# Altium PCB Controller.PcbDoc
Units mil, origin at the board's own origin, x right, y up, seen from the top; angles counter-clockwise.
Board outline 3100 x 1970 mil, 2 copper layers (Top Layer, Bottom Layer); 37 components, 28 nets, 140 pads, 38 vias.
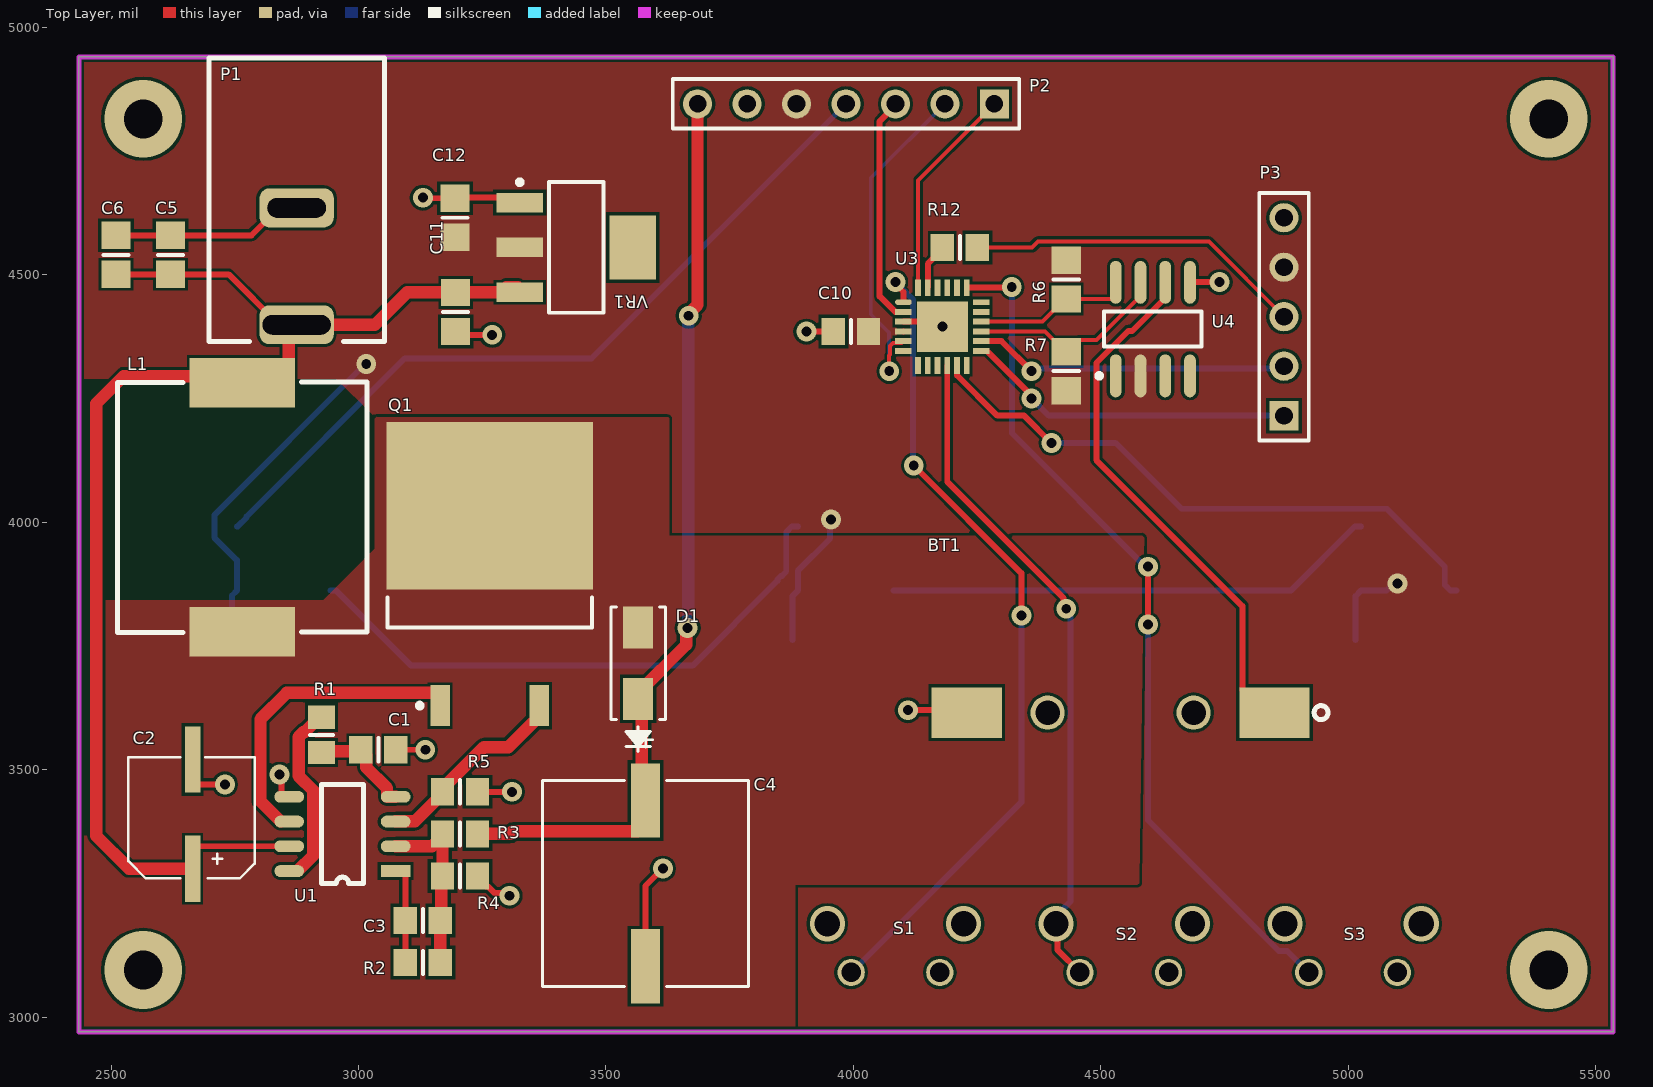
[diagram p0: Top Layer view]
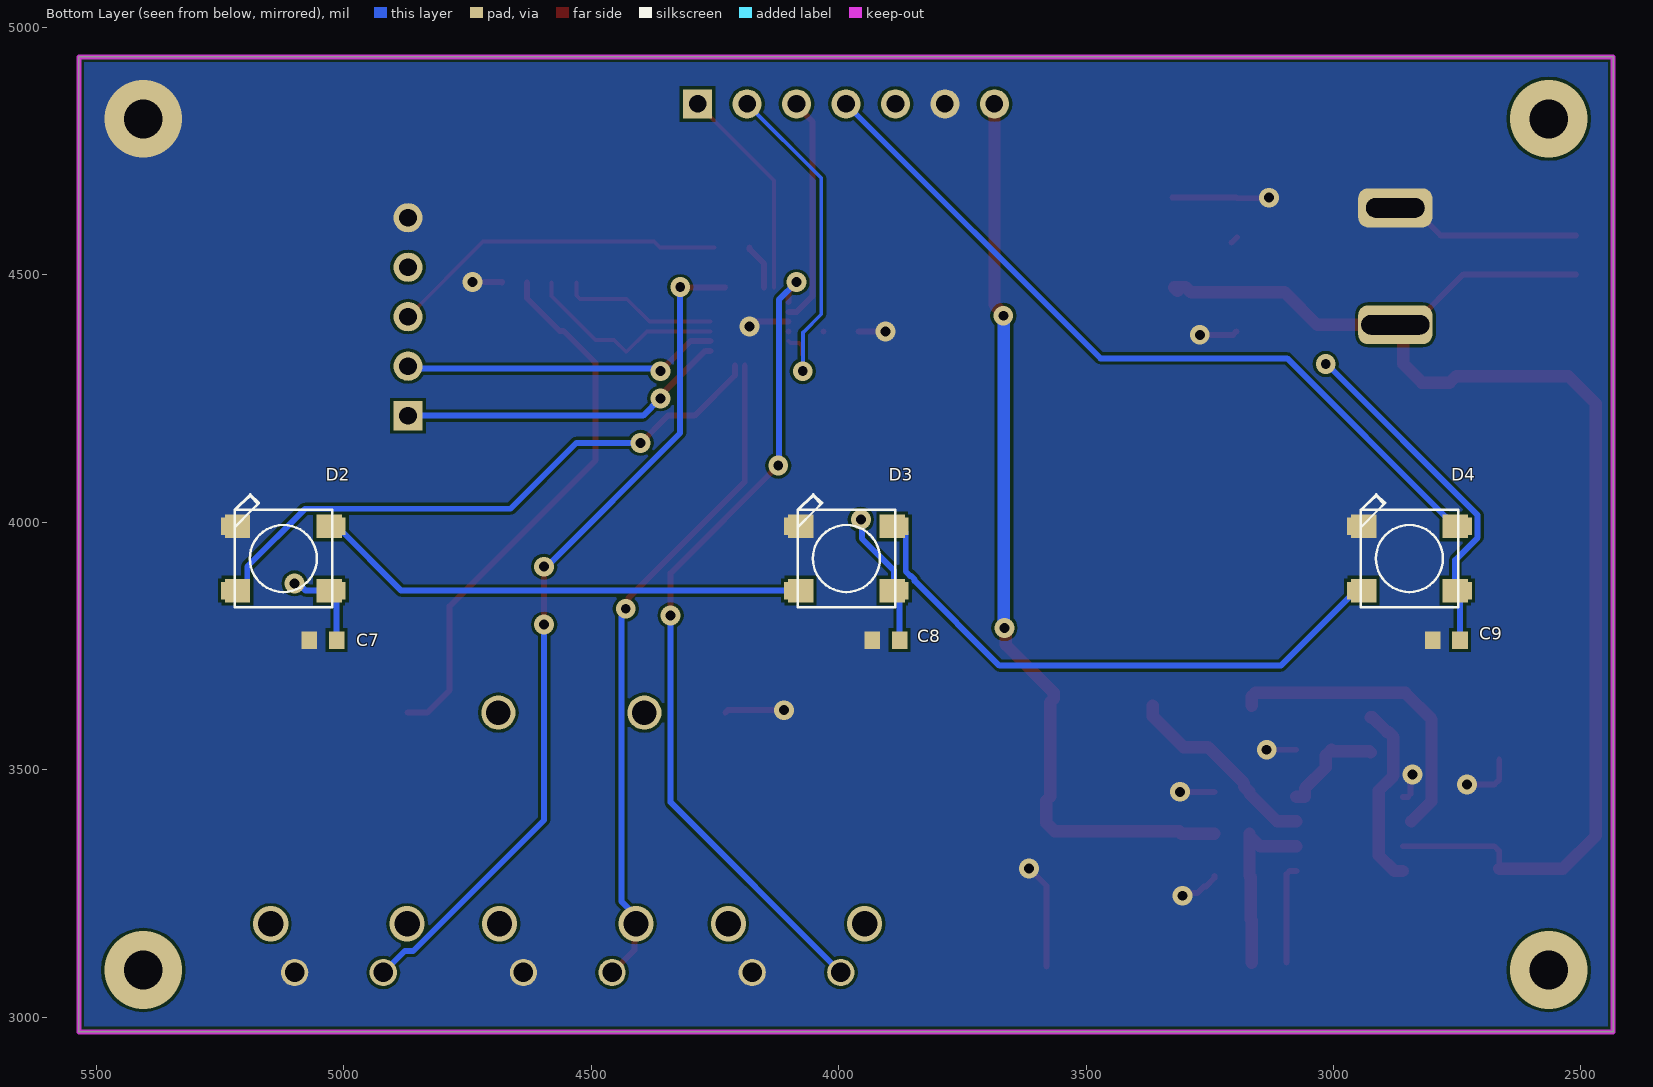
[diagram p1: Bottom Layer view, seen from below]

## Layer stack, top to bottom
Top Solder: solder mask 0.4, Solder Resist, Dk 3.5
Top Layer: signal copper 1.4
Dielectric 1: dielectric 12.6, FR-4, Dk 4.8
Bottom Layer: signal copper 1.4
Bottom Solder: solder mask 0.4, Solder Resist, Dk 3.5

## Board outline
2435,2970 5535,2970 5535,4940 2435,4940

## Design rules (kind name [scope] priority, off if disabled: settings)
Clearance [All] p1: gap=6 ignorepadtopadclearanceinfootprint=FALSE except(0: Arc-Hole Track-Hole SMDPad-Hole THPad-Hole Via-Hole Fill-Hole Poly-Hole Region-Hole Text-Hole)
PlaneConnect [All] p1: planeconnectstyle=Direct reliefexpansion=20 reliefentries=4 reliefconductorwidth=10 reliefairgap=10
PolygonConnect [All] p1: connectstyle=Direct reliefconductorwidth=10 reliefentries=4 polygonreliefangle="90 Angle" airgapwidth=10
RoutingVias [All] p1: holewidth=28 width=50 viastyle="Through Hole" minholewidth=20 minwidth=35 maxholewidth=28 maxwidth=50
SolderMaskExpansion [All] p1: expansion=4 istentingtop=FALSE
Width [All] p1: maxlimit=100 minlimit=8 preferedwidth=12 minimp=50.000000 maximp=50.000000 favimp=50.000000
29 further rules are at their usual default settings.

## Classes and differential pairs
component class BoostConverter: C1 C2 C3 C4 D1 L1 Q1 R1 R2 R3 R4 R5 U1
component class Controller: BT1 C5 C6 C7 C8 C9 C10 C11 C12 D2 D3 D4 P1 P2 P3 R6 R7 R12 S1 S2 S3 U3 U4 VR1

## Components (designator, comment, footprint, x,y, rotation, side; value= is the part's Value field where it differs from the comment)
BT1 "Battery" 1048P_KEY 4540,3615 r180 top
C1 "1000pF" 6-0805_N 3040,3540 r180 top value=0805
C2 "220uF" CapacitorxNichicon 2665,3410 r270 top value=LowESR
C3 "100pF" 6-0805_N 3130,3195 r180 top value=0805
C4 "2.2uF" CAP_UCD_10X10_NCH 3580,3270 r270 top value=400V
C5 "10uF" 6-0805_M 2620,4540 r270 top value=0805
C6 "0.1uF" 6-0805_M 2510,4540 r270 top
C7 "0.1uF" 1608[0603] 5041.91,3761.46 r180 bottom
C8 "0.1uF" 1608[0603] 3904.12,3761.46 r180 bottom
C9 "0.1uF" 1608[0603] 2771.91,3761.46 r180 bottom
C10 "0.1uF" 6-0805_N 3995,4385.35 r0 top
C11 "10uF" 6-0805_M 3196.18,4424.72 r90 top value=0805
C12 "22uF" 6-0805_M 3195,4615 r270 top value=0805
D1 "BYG23T-M3" DIODE_SMA_DO-214AC_VIS 3565,3715 r90 top
D2 "WS2812B" WS2812B-NARROW 5121.91,3926.46 r180 bottom
D3 "WS2812B" WS2812B-NARROW 3984.23,3926.46 r180 bottom
D4 "WS2812B" WS2812B-NARROW 2846.55,3926.46 r180 bottom
L1 "100uH" inductor12mm 2765,4030 r0 top value=Wurth
P1 "BarrelConnector5.5" BarrelConnector5.5 2875,4635 r0 top
P2 "Header 7" HDR1X7 4285,4845 r180 top
P3 "Header 5" HDR1X5 4870,4215 r90 top
Q1 "IRF740" D2PAK_L 3265,3895 r90 top
R1 "47K" 6-0805_N 2925,3570 r90 top value=0805
R2 "150K" 6-0805_N 3130,3110 r180 top value=0805
R3 "499K" 6-0805_N 3205,3370 r0 top value=0805
R4 "6.98K" 6-0805_N 3205,3285 r180 top value=0805
R5 "0.5R" 6-0805_N 3205,3455 r180 top value=0805
R6 "4.7K" 6-0805_M 4430,4490 r90 top value=0805
R7 "4.7K" 6-0805_M 4430,4305 r270 top value=0805
R12 "470K" 6-0805_N 4215,4555 r0 top value=0805
S1 "SW-PB" Button2 4085,3090 r0 top
S2 "SW-PB" Button2 4547.28,3090 r0 top
S3 "SW-PB" Button2 5009.57,3090 r0 top
U1 "UC3843" UC3843BD1 3075,3295 r180 top
U3 "attiny1617" "Quad24 - 1617" 4101.06,4444.41 r0 top
U4 "DS3231MZ+" SO8_N 4605,4390 r90 top
VR1 "Volt Reg" SOT223_N 3440,4555 r0 top

## Footprints (in the part's own frame and the unit in brackets; to place one, negate y for a bottom-side part, rotate by r counter-clockwise, add the part's x,y. Pads: shape width x height; smd on the part's side, far side on the other; paste and mask are expansions set on the pad)
6-0805_M [mm] "Chip Resistor, Body 2.0x1.2mm, IPC Low Density"
  rect 1.4x1.5 smd: 1(-1,0) 2(1,0)
  silkscreen extent 0,-0.65 0,0.65, body extent -1.07,-0.7 1.07,0.7, height 0.7
6-0805_N [mm] "Chip Resistor, Body 2.0x1.2mm, IPC Medium Density"
  rect 1.2x1.4 smd: 1(-0.9,0) 2(0.9,0)
  silkscreen extent 0,-0.6 0,0.6, body extent -1.07,-0.7 1.07,0.7, height 0.7
1048P_KEY [mil]
  rect 142x102 smd paste+0 mask+0: 1(-311,0) 2(311,0)
  round 69 hole 49: 3(-147.5,0) 4(147.5,0)
  silkscreen extent -419,-14 -391,14, body extent 0,0 10,10, height 10
1608[0603] [mm] "Chip Capacitor, Body 1.6x0.8mm, IPC High Density"
  rect 0.8x0.9 smd: 1(-0.7,0) 2(0.7,0)
  body extent -0.87,-0.48 0.87,0.48, height 1.3
BarrelConnector5.5 [mm]
  rrect50% 3.81x2 hole 1 slot 3.5 at 0 deg: 1(0,-6)
  rrect50% 3.81x2 hole 1 slot 3 at 0 deg: 2(0,0)
  silkscreen extent -4.5,-6.86 4.5,7.7, body extent -4.44,-6.86 4.44,7.62, height 12
Button2 [mm]
  round 1.4 hole 1: 1(-2.275,0) 2(2.275,0)
CAP_UCD_10X10_NCH [mil]
  rect 150x59 smd paste+0 mask+0: 1(-167.5,0) 2(167.5,0)
  silkscreen extent -305,-208 208,208, body extent 0,0 10,10, height 10
CapacitorxNichicon [mm]
  rect 3.4x0.8 smd: 1(-2.8,0) 2(2.8,0)
  silkscreen extent -2.92,-3.3 3.3,3.18
D2PAK_L [mm] "D2-PAK, 4-Leads, Body 8.8x10.4mm, Pitch 2.54mm, Lead Span 15.1mm, IPC High Density"
  rect 2.1x1 smd: 1(-6.75,2.54) 3(-6.75,-2.54)
  rect 8.6x10.6 smd: 2(3.5,0)
  silkscreen extent -6.87,-5.25 -1.2,5.25, body extent -2.75,-5.28 6.25,5.28, height 4.69
DIODE_SMA_DO-214AC_VIS [mil]
  rect 85x61 smd paste+0 mask+0: 1(-72,0) 2(72,0)
  silkscreen extent -178,-55 114,55, body extent 0,0 10,10, height 10
HDR1X5 [mm] "Connector; Header; 5 Position"
  rect 1.5x1.5 hole 0.9: 1(0,0)
  round 1.5 hole 0.9: 2(2.54,0) 3(5.08,0) 4(7.62,0) 5(10.16,0)
  silkscreen extent -1.27,-1.27 11.43,1.27
HDR1X7 [mm] "Connector; Header; 7 Position"
  rect 1.5x1.5 hole 0.9: 1(0,0)
  round 1.5 hole 0.9: 2(2.54,0) 3(5.08,0) 4(7.62,0) 5(10.16,0) 6(12.7,0) 7(15.24,0)
  silkscreen extent -1.27,-1.27 16.51,1.27
inductor12mm [mm]
  rect 5.4x2.54 smd: 1(0,6.4) 2(0,-6.4)
  silkscreen extent -6.4,-6.43 6.4,6.43, body extent -6.35,-6.48 6.35,6.35, height 10
"Quad24 - 1617" [mm]
  oval 0.85x0.3 smd: 1(0,0)
  rect 0.85x0.3 smd: 2(0,-0.5) 3(0,-1) 4(0,-1.5) 5(0,-2) 6(0,-2.5) 13(4,-2.5) 14(4,-2) 15(4,-1.5) 16(4,-1) 17(4,-0.5) 18(4,0)
  rect 0.3x0.85 smd: 7(0.75,-3.25) 8(1.25,-3.25) 9(1.75,-3.25) 10(2.25,-3.25) 11(2.75,-3.25) 12(3.25,-3.25) 19(3.25,0.75) 20(2.75,0.75) 21(2.25,0.75) 22(1.75,0.75) 23(1.25,0.75) 24(0.75,0.75)
  rect 2.6x2.6 smd: 25(2.005,-1.255)
SO8_N [mm] "SOIC, 8-Leads, Body 4.9x3.9mm, Pitch 1.27mm, IPC Medium Density"
  oval 2.2x0.6 smd: 1(-2.4,1.905) 2(-2.4,0.635) 3(-2.4,-0.635) 4(-2.4,-1.905) 5(2.4,-1.905) 6(2.4,-0.635) 7(2.4,0.635) 8(2.4,1.905)
  silkscreen extent -2.52,-2.5 0.9,2.88, body extent -2,-2.5 2,2.5, height 1.75
SOT223_N [mm] "SOT223, 4-Leads, Body 6.5x3.5mm, Pitch 2.3mm, Lead Span 7mm, IPC Medium Density"
  rect 2.4x1 smd: 1(-2.9,2.3) 2(-2.9,0) 3(-2.9,-2.3)
  rect 2.4x3.3 smd: 4(2.9,0)
  silkscreen extent -3.02,-3.35 1.4,3.47, body extent -1.85,-3.35 1.85,3.35, height 1.7
UC3843BD1 [mil]
  rect 60x24 smd: 1(0,0)
  oval 60x24 smd: 2(0,-50) 3(0,-100) 4(0,-150) 5(215,-150) 6(215,-100) 7(215,-50) 8(215,0)
  silkscreen extent 65,-175 150,25
WS2812B-NARROW [mm]
  rect 1.3x1.2 smd: 1-VDD(2.35,-1.65) 2-DOUT(2.35,1.65) 3-GND(-2.35,1.65) 4-DIN(-2.35,-1.65)
  rect 1.5x0.9 smd: 1-VDD(2.45,-1.65) 2-DOUT(2.45,1.65) 3-GND(-2.45,1.65) 4-DIN(-2.45,-1.65)
  silkscreen extent -2.5,-2.5 2.5,3.3

## Part data
BT1: "Multicell Battery", LatestRevisionDate=17-Jul-2002, LatestRevisionNote="Re-released for DXP Platform.", PackageDescription="Battery; 2 Leads", PackageReference=BAT-2, Published=24-Mar-1999, Publisher="Altium Limited"
C1 C3 C5 C6 C7 C8 C9 C10 C11 C12: library part Cap, "Capacitor", LatestRevisionDate=17-Jul-2002, LatestRevisionNote="Re-released for DXP Platform.", PackageDescription="Radial Cap, Thru-Hole; 2 Leads; 0.3 in Pin Spacing", PackageReference=RAD-0.3, Published=8-Jun-2000, Publisher="Altium Limited"
C2: library part "Cap Pol1", "Polarized Capacitor (Radial)", LatestRevisionDate=17-Jul-2002, LatestRevisionNote="Re-released for DXP Platform.", PackageDescription="Polarized Capacitor (Radial); 2 Leads", PackageReference=RB7.6-15, Published=8-Jun-2000, Publisher="Altium Limited", Supplier 1=Digi-Key
C4: library part "Cap Pol1", "Polarized Capacitor (Radial)", Supplier Part Number 1=493-9969-1-ND, LatestRevisionDate=17-Jul-2002, LatestRevisionNote="Re-released for DXP Platform.", PackageDescription="Polarized Capacitor (Radial); 2 Leads", PackageReference=RB7.6-15, Published=8-Jun-2000, Publisher="Altium Limited", Supplier 1=Digi-Key
D1: library part Diode, "Default Diode", Supplier Part Number 1=BYG23T-M3/CT-ND, Code_JEDEC=DO-214-AB, LatestRevisionDate=17-Jul-2002, LatestRevisionNote="Re-released for DXP Platform.", PackageDescription="DO-214-AB/SMC; 2 C-Bend Leads; Body 7.9 x 5.9 mm, inc. leads (LxW)", PackageReference=SMC, PackageVersion=Sep-1996, Published=8-Jun-2000, Publisher="Altium Limited", Supplier 1=Digi-Key
D2 D3 D4: "Raspberry Pi HAT _40 pin_ Wheeled Robotics Kit", Package=None, Supplier Part Number 1=1528-1104-ND, Availability=Unavailable, MF="SparkFun Electronics", MP=WS2812B, Price=None, SnapEDA_Link=https://www.snapeda.com/parts/WS2812B/Worldsemi/view-part/1038297/?ref=snap, Supplier 1=Digi-Key
L1: library part Inductor, "Inductor", Supplier Part Number 1=732-1235-1-ND, Code_IEC=1005, Code_JEITA=0402, LatestRevisionDate=29-May-2009, LatestRevisionNote="IPC-7351 Footprint Added.", PackageDescription="Chip Inductor", PackageReference=0402-A, Published=8-Jun-2000, Publisher="Altium Limited", Supplier 1=Digi-Key
P1: Supplier Part Number 1=CP-037A-ND, Supplier 1=Digi-Key
P2: "Header, 7-Pin", LatestRevisionDate=17-Jul-2002, LatestRevisionNote="Re-released for DXP Platform.", Publisher="Altium Limited"
P3: "Header, 5-Pin", LatestRevisionDate=17-Jul-2002, LatestRevisionNote="Re-released for DXP Platform.", Publisher="Altium Limited"
Q1: library part MOSFET-N, "N-Channel MOSFET", Supplier Part Number 1=IRF740SPBF-ND, LatestRevisionDate=17-Jul-2002, LatestRevisionNote="Re-released for DXP Platform.", PackageDescription="TO, Flat Index; 3 In-Line, Axial Leads; Body Dia. 4.6mm; Lead Dia. 0.5 mm (max)", PackageReference=E3, PackageVersion=1995/1996, Published=8-Jun-2000, Publisher="Altium Limited", Supplier 1=Digi-Key
R1 R2 R3 R4 R5 R6 R7 R12: library part Res1, "Resistor", LatestRevisionDate=17-Jul-2002, LatestRevisionNote="Re-released for DXP Platform.", PackageDescription="Axial Device, Thru-Hole; 2 Leads; 0.3 in Pin Spacing", PackageReference=AXIAL-0.3, Published=8-Jun-2000, Publisher="Altium Limited"
S1 S2 S3: "Switch", LatestRevisionDate=17-Jul-2002, LatestRevisionNote="Re-released for DXP Platform.", PackageDescription="Switch; 2 Leads", PackageReference=SPST-2, Published=24-Mar-1999, Publisher="Altium Limited"
U3: Supplier Part Number 1=ATTINY1617-MFRCT-ND, Supplier 1=Digi-Key
U4: library part DS3232MZ+, "+/-5ppm, I2C Real-Time Clock with Internal MEMs Resonator and SRAM, 8-Pin SO, -40 to 85 degC, Pb-Free", Supplier Part Number 1=DS3231MZ+-ND, Code_IPC=SOIC127P600-8, Code_JEDEC=MS-012-AA, ComponentLink1Description="Manufacturer URL", ComponentLink1URL=http://www.maxim-ic.com, ComponentLink2Description=Datasheet, ComponentLink2URL=http://datasheets.maxim-ic.com/en/ds/DS3232M.pdf, ComponentLink3Description="Package Specification", ComponentLink3URL=http://pdfserv.maxim-ic.com/package_dwgs/21-0041.PDF, DatasheetVersion="Rev 0, Mar-2012", PackageDescription="8-Pin Small-Outline IC, Narrow (0.15in), 1.27 mm Pitch, SOIC (N), Pb-Free", PackageReference=S8MK+1, PackageVersion="revC, 2010", Supplier 1=Digi-Key
VR1: "Voltage Regulator", LatestRevisionDate=29-May-2009, LatestRevisionNote="IPC-7351 Footprint Added.", PackageDescription="3-Pin Transistor Outline Package 2.54 mm Pitch, 15.1 mm Lead Span", PackageReference=D2PAK, Published=24-Mar-1999, Publisher="Altium Limited"

## Via types
v1: diameter 40, hole 20, Top Layer to Bottom Layer, tented both sides, 27 vias
v2: diameter 70.87, hole 51.18, Top Layer to Bottom Layer, 6 vias
v3: diameter 157.48, hole 78.74, Top Layer to Bottom Layer, 4 vias
v4: diameter 40, hole 20, Top Layer to Bottom Layer, 1 vias

## Nets (pads, with @x,y where several pads share a name; then routed paths per layer and width w, separated by ;. In a path a pad name is that pad's centre, name@x,y a point inside that pad or via, vN(x,y) a via of type N, cw(c..) or ccw(c..) an arc to the next point about the centre after c; other vN are vias at no path point)
+5: C7.2 C8.2 C9.2 C10.2 C12.2 D2.1-VDD D3.1-VDD D4.1-VDD P2.5 P3.4 R6.2 R7.2 U3.4 U4.2 VR1.2 | length 1184.8
  Top Layer w12: C12.2 C12.2@3205.63,4565 ; C10.2 C10.2@4030.53,4385.26 ; U3.4@4100.96,4385.26 U3.4
  Bottom Layer w12: C9.2 2744.35,3851.82 2754.03,3861.49 2754.03,3923.26 2708.57,3968.73 2708.57,4014.1 3013.93,4319.47 v1(3015.69,4319.47) ; C8.2 3876.56,3850.28 3887.77,3861.49 3887.77,3901.71 3953.06,3967 3953.06,4003.08 v1(3954.99,4005) ; C7.2 5014.35,3850.39 5025.46,3861.49 5029.39,3861.49 5076.94,3861.49 5091.56,3876.11 v1(5099.13,3876.11)
+12: C2.2 C5.2 C6.2 C11.2 L1.1 P1.1 U1.7 VR1.3 | length 2745
  Top Layer w12: C6.2 C5.2 2737.52,4500.63 2839.37,4398.78 P1.1 ; C2.2 2665,3335.25 2674.75,3345 U1.7
  Top Layer w25: C2.2 2536.3,3299.76 2470,3366.06 2470,4239.37 2525.63,4295 2751.97,4295 L1.1 2821.3,4281.97 2858.8,4319.47 2858.8,4382.58 P1.1 3032.93,4398.78 3098.24,4464.09 C11.2 3287.91,4464.09 3298.27,4474.45 3322.19,4474.45 VR1.3@3315,4467.26
BT1: S1.1 U3.1 | length 1690.1
  Top Layer w12: v1(4085,4485) 4085,4481.09 4101.06,4465.04 U3.1 ; v1(4121.89,4114.34) 4339.42,3896.81 v1(4339.42,3811.35)
  Bottom Layer w12: S1.1 4339.42,3433.99 v1(4339.42,3811.35) ; v1(4085,4485) 4120,4450 4120,4116.23 v1(4121.89,4114.34)
BT2: S2.1 U3.10 | length 1361.9
  Top Layer w12: U3.10 4189.64,4081.34 4424.64,3846.34 4424.64,3830.36 v1(4430,3825) ; v2(4409.49,3188.43) 4412.72,3185.19 4412.72,3134.99 S2.1
  Bottom Layer w12: v2(4409.49,3188.43) 4409.49,3204.35 4439,3233.87 4439,3808.42 4430,3817.42 v1(4430,3825)
BT3: S3.1 U3.19 | length 1738.1
  Top Layer w12: U3.19 4229.01,4474.37 4229.1,4474.47 4319.47,4474.47 v1(4320,4475) ; v1(4594.97,3792.89) v1(4595,3910)
  Bottom Layer w12: v1(4320,4475) 4320,4180 4590,3910 v1(4595,3910) ; v1(4594.97,3792.89) 4594.97,3398.15 4859.6,3133.51 4876.49,3133.51 S3.1
CLK: P2.3 U3.2 | length 463.1
  Top Layer w12: P2.3 4085,4841.79 4053,4809.79 4053,4456.31 4084.5,4424.82 4100.96,4424.82 U3.2
Din: P2.1 U3.24 | length 435
  Top Layer w8: U3.24 4130.58,4690.58 P2.1
GND: BT1.2 C1.1 C2.1 C4.2 C5.1 C6.1 C7.1 C8.1 C9.1 C10.1 C11.1 C12.1 D2.3-GND D3.3-GND D4.3-GND P1.2 P2.6 P3.5 R4.1 R5.1 S1.2 S2.2 S3.2 U1.5 U3.3 U3.25 U4.5 VR1.1 | length 1559.6
  Top Layer w12: C6.1 C5.1 2783.74,4579.37 2839.37,4635 P1.2 ; C2.1 2665,3479.75 2674.75,3470 v1(2730,3470) ; v1(2840.44,3490) 2844.22,3486.22 2844.22,3450.54 2849.76,3445 U1.5 ; C1.1 3075.5,3540 v1(3135,3540) ; v1(3130,4655.55) 3131.18,4654.37 C12.1 3196.18,4655.55 VR1.1@3325.83,4655.55 ; C11.1 3203.08,4378.45 v1(3270,4378.45) ; R4.1 3240.43,3281.06 3258.06,3263.44 3261.99,3263.44 3275.08,3250.36 3299.64,3250.36 v1(3305,3245) ; R5.1 v1(3310,3455) ; C4.2 3580,3265 v1(3615,3300) ; v1(3905,4385) 3959.21,4385 C10.1 ; U3.3 U3.25@4169.96,4405.04 ; v1(4110,3620) 4224,3620 BT1.2 ; U4.5 4680.51,4485 v1(4740,4485)
  other v3: 5405,4815
  other v4: 4180,4395
HV: C4.1 D1.1 P2.7 R3.2 | length 1857.6
  Top Layer w25: R3.2 3307,3370 3312,3375 3563,3375 3580,3392 C4.1 3572.5,3445 3572.5,3635.5 D1.1 3565,3655 3662.13,3752.13 3662.13,3783.24 v1(3665,3786.11) ; v1(3667.08,4417.07) 3667.08,4421.13 3685,4439.05 P2.7
  Bottom Layer w25: v1(3665,3786.11) 3666.04,3787.15 3666.04,4416.03 v1(3667.08,4417.07)
LE: P2.2 U3.5 | length 700.2
  Top Layer w8: v1(4072.32,4305) 4072.32,4336.94 4074.32,4338.94 4074.32,4356.03 4080.18,4361.89 4097.28,4361.89 U3.5
  Bottom Layer w8: v1(4072.32,4305) 4072.32,4382.68 4035,4420 4035,4695 P2.2
LED: D4.2-DOUT P2.4 | length 1585.7
  Bottom Layer w12: D4.2-DOUT@2754.03,3991.42 2756,3991.42 2773.62,4009.04 2773.62,4011.01 3093.47,4330.86 3470.86,4330.86 P2.4
LEDIn: D2.4-DIN U3.11 | length 1230.8
  Top Layer w12: U3.11 4209.42,4316.36 4209.42,4296.44 4290.86,4215 4345,4215 v1(4400,4160)
  Bottom Layer w12: v1(4400,4160) 4530,4160 4662.96,4027.04 5077.96,4027.04 5194.84,3910.16 5194.84,3873.21 5206.56,3861.49 5214.43,3861.49 D2.4-DIN@5218.37,3861.49
NetBT1_1: BT1.1 U4.6 | length 1112.6
  Top Layer w12: U4.6 4630,4452.99 4563.14,4386.13 4555.45,4386.13 4490.81,4321.5 4490.81,4125.35 4786,3830.16 4786,3660 4831,3615 BT1.1 BT1.1@4871,3615
NetC1_2: C1.2 R1.1 U1.4 | length 215.9
  Top Layer w25: R1.1 2927.72,3537.28 3001.85,3537.28 C1.2 3015.69,3528.88 3015.69,3504.31 3057.5,3462.5 3057.5,3445.5 3058,3445 U1.4
NetC3_1: C3.1 R2.1 R3.1 R4.2 U1.2 | length 365
  Top Layer w25: U1.2 3148.5,3345 R3.1@3169.57,3366.06 ; R2.1 C3.1 3167.5,3197.07 3167.5,3282.93 R4.2 R3.1@3169.57,3366.06 ; R3.1 R3.1@3169.57,3366.06
NetC3_2: C3.2 R2.2 U1.1 | length 201.1
  Top Layer w12: U1.1 3088.57,3295 3094.57,3289 C3.2 R2.2
NetD1_1: D1.2 L1.2 Q1.2
NetD2_2-DOUT: D2.2-DOUT D3.4-DIN | length 998.6
  Bottom Layer w12: D3.4-DIN@4080.69,3861.49 4883.72,3861.49 5013.64,3991.42 D2.2-DOUT@5025.46,3991.42
NetD3_2-DOUT: D3.2-DOUT D4.4-DIN | length 1172.4
  Bottom Layer w12: D4.4-DIN@2943.01,3861.49 2954.82,3861.49 3106.31,3710 3675,3710 3846.25,3881.25 3846.25,3884.18 3853.28,3891.21 3855.24,3891.21 3864.25,3900.21 3864.25,3979.7 3875.96,3991.42 D3.2-DOUT@3887.77,3991.42
NetQ1_2: Q1.1 U1.6 | length 629.8
  Top Layer w25: U1.6@2842.5,3395.5 2801.94,3436.06 2801.94,3601.94 2855,3655 3157.81,3655 3165,3647.81 Q1.1
NetQ1_3: Q1.3 R5.2 U1.3 | length 405.8
  Top Layer w25: U1.3 3075.5,3395.5 3114,3395.5 3169.57,3451.06 R5.2 3180.69,3466.12 3180.69,3472.6 3253.41,3545.32 3302.72,3545.32 3365,3607.6 Q1.3
NetR1_2: R1.2 U1.8 | length 375.6
  Top Layer w25: U1.8 2877,3295 2908.5,3326.5 2908.5,3457.63 2878.94,3487.19 2878.94,3565.85 2889.78,3576.69 2892.32,3576.69 2921.06,3605.43 R1.2
NetR12_1: R12.1 U3.23 | length 93.2
  Top Layer w12: U3.23 4150.27,4521.76 4179.57,4551.06 R12.1
RXD: P3.1 U3.13 | length 668.7
  Top Layer w12: U3.13 4269.17,4345.98 4360,4255.16 v1(4360,4250)
  Bottom Layer w12: v1(4360,4250) 4395,4215 P3.1
SCL: R6.1 U3.16 U4.8 | length 320
  Top Layer w8: U3.16 4382.44,4405.04 4428.03,4450.63 R6.1 4522.78,4450.63 4530,4457.85 U4.8
SDA: R7.1 U3.15 U4.7 | length 412.5
  Top Layer w8: U3.15 4387.05,4385.35 4428.03,4344.37 R7.1 4453.56,4367.93 4490.81,4367.93 4580,4457.12 U4.7
TXD: P3.2 U3.14 | length 640.7
  Top Layer w12: U3.14 4299.33,4365.67 v1(4360,4305)
  Bottom Layer w12: v1(4360,4305) 4365,4310 4865,4310 P3.2
UDPI: P3.3 R12.2 | length 687.4
  Top Layer w8: R12.2 4360.9,4555 4372.83,4566.93 4718.07,4566.93 P3.3
pads on no net: BT1.3 BT1.4 U3.6 U3.7 U3.8 U3.9 U3.12 U3.17 U3.18 U3.20 U3.21 U3.22 U4.1 U4.3 U4.4 VR1.4
copper on no net:
  other v2: 3947.2,3188.43 4222.8,3188.43 4685.08,3188.43 4871.77,3188.43 5147.36,3188.43
  other v3: 2565,3095 5405,3095 2565,4815

## Polygon pours and split planes (outlines as drawn)
+5 on Top Layer "+5_L01_P003" (solid, pour order 3): 3035,4210 2955,4290 2435,4290 2435,4940 5535,4940 5535,2970 3880,2970 3880,3270 4575,3270 4585,3970 3625,3970 3625,4209.07
NetD1_1 on Top Layer "NETD1_1_L01_P001" (solid, pour order 1): 2435,2962.49 cw(c2435,2965) 2432.49,2965 2432.49,3840 cw(c2435,3840) 2435,3842.51 2928.96,3842.51 3032.49,3946.04 3032.49,4210 cw(c3035,4210) 3035,4212.52 3625,4211.59 cw(c3625,4209.07) 3627.51,4209.07 3627.51,3972.51 4585,3972.51 cw(c4585,3970) 4587.52,3970 cw(c4585,3970) 4587.51,3969.95 4587.51,3969.96 4587.51,3969.95 4577.51,3269.98 ccw(c4575,3270) 4577.52,3270 4577.51,3269.98 4577.51,3269.96 4577.51,3269.98 cw(c4575,3270) 4575,3267.49 3882.51,3267.49 3882.51,2970 cw(c3880,2970) 3880.27,2967.5 cw(c3880,2965) 3882.51,2965 cw(c3880,2965) 3880,2962.49
GND on Bottom Layer "GND_L02_P002" (solid, pour order 2): 2435,2970 5535,2970 5535,4940 2435,4940

## Keep-outs
Keep-Out Layer:
  the board outline again, w10

## Silkscreen, mask and mechanical layers (free items; w line width, h text height)
PolyDraw:
  lines w5: 3880,2965 2435,2965 2435,3840 2930,3840 3035,3945 3035,4210 ; 3035,4210 2955,4290 2435,4290 2435,4940 5535,4940 5535,2970 3880,2970 3880,3270 4575,3270 4585,3970 3625,3970 3625,4209.07 3035,4210